# EAGLE board MicroMod-Ethernet-Function-Board-Panel-W5500 (EAGLE 9.6.2), part 1 of 3
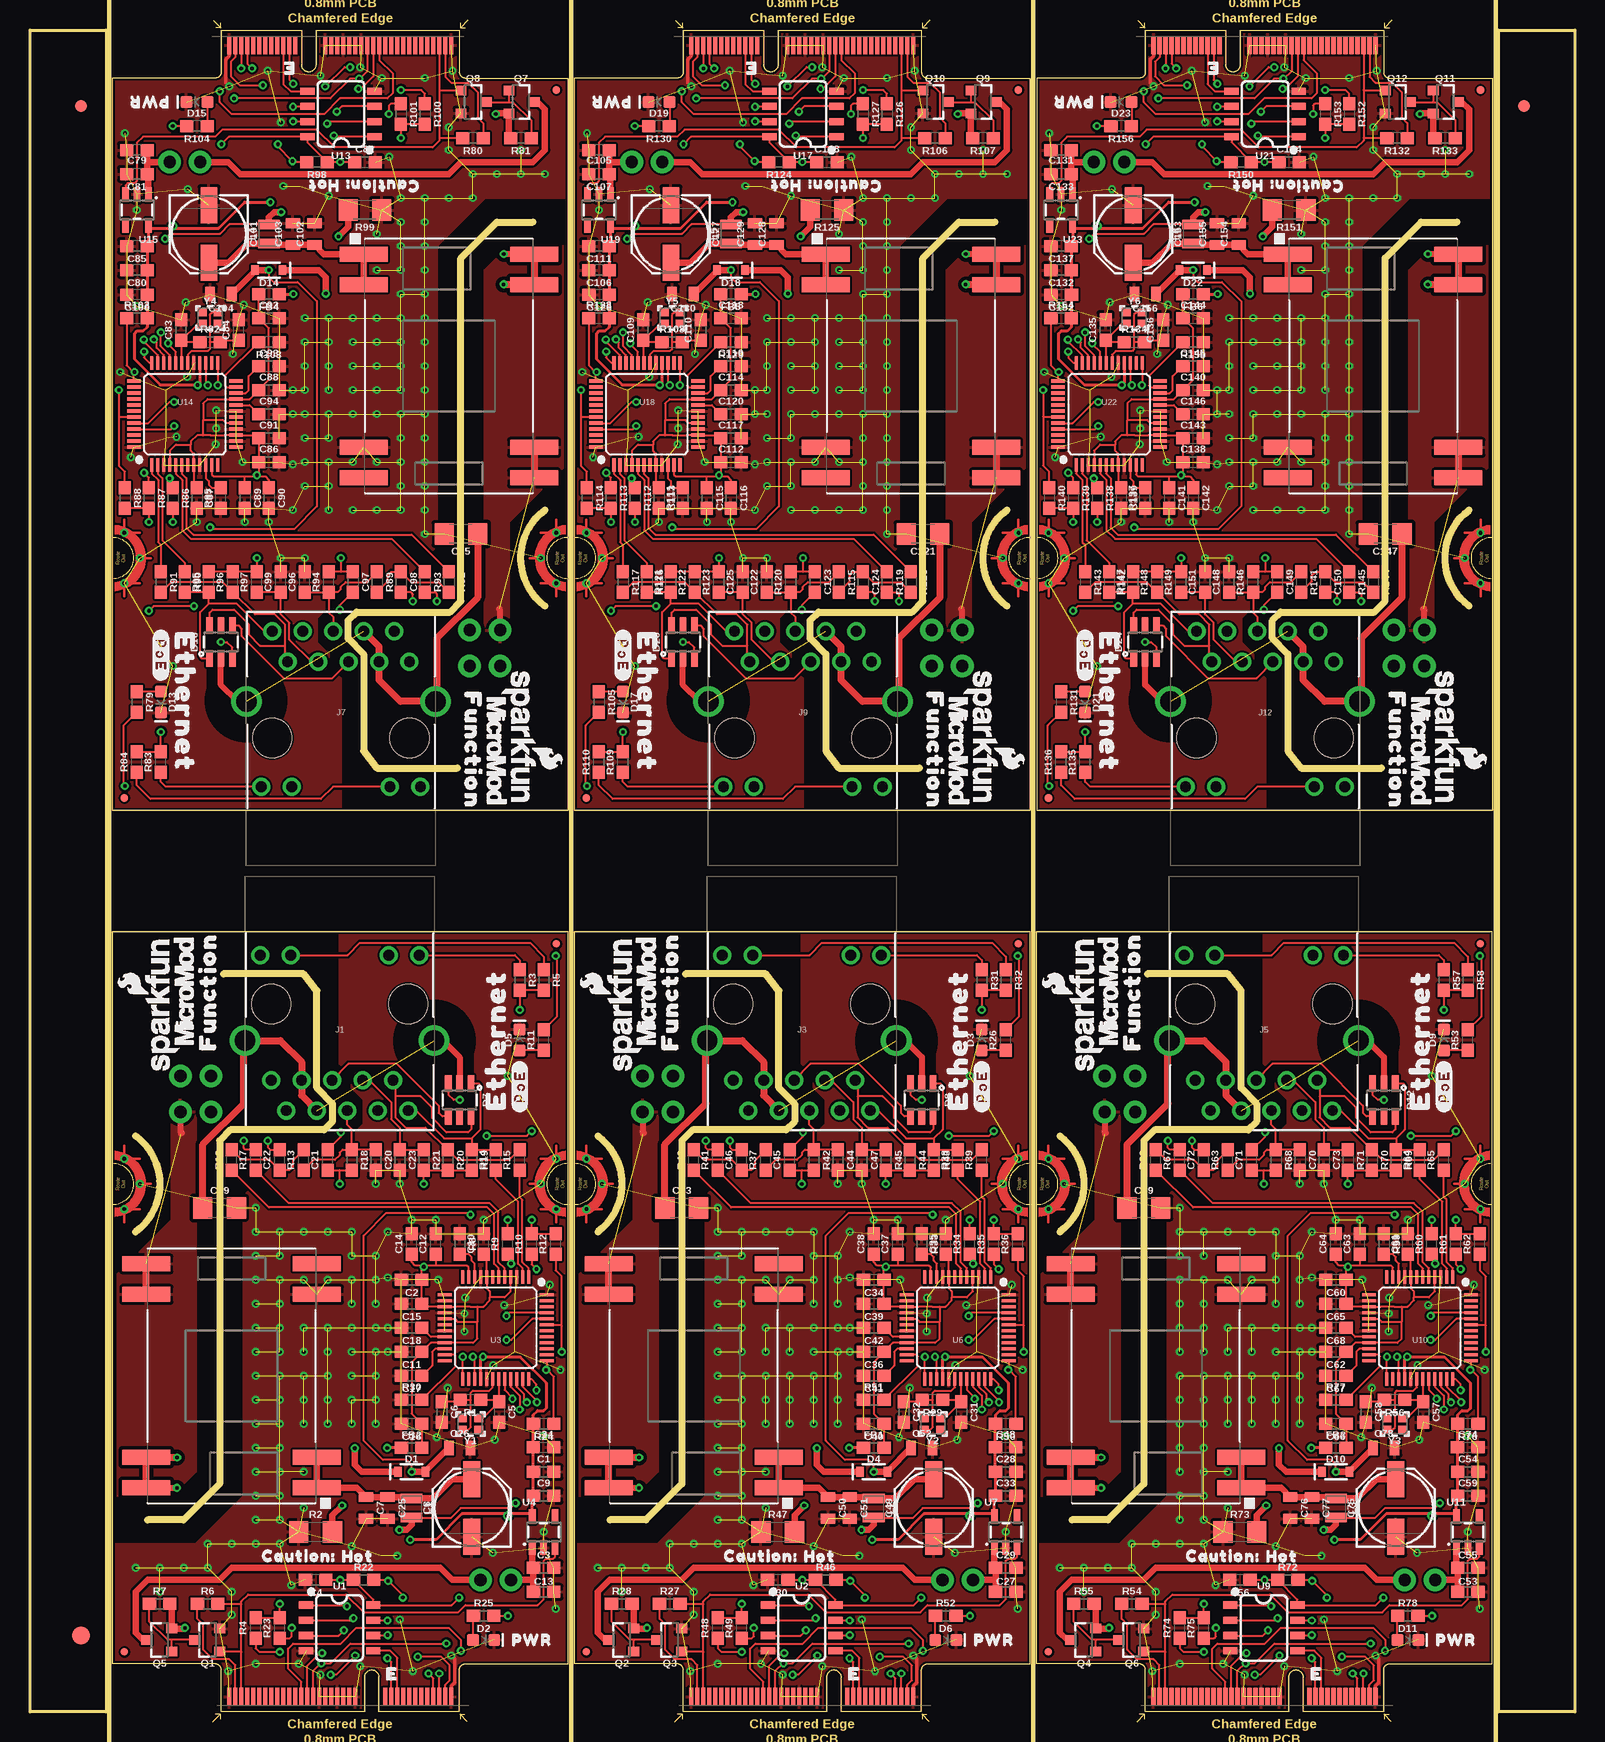
[diagram p0: board, top side]
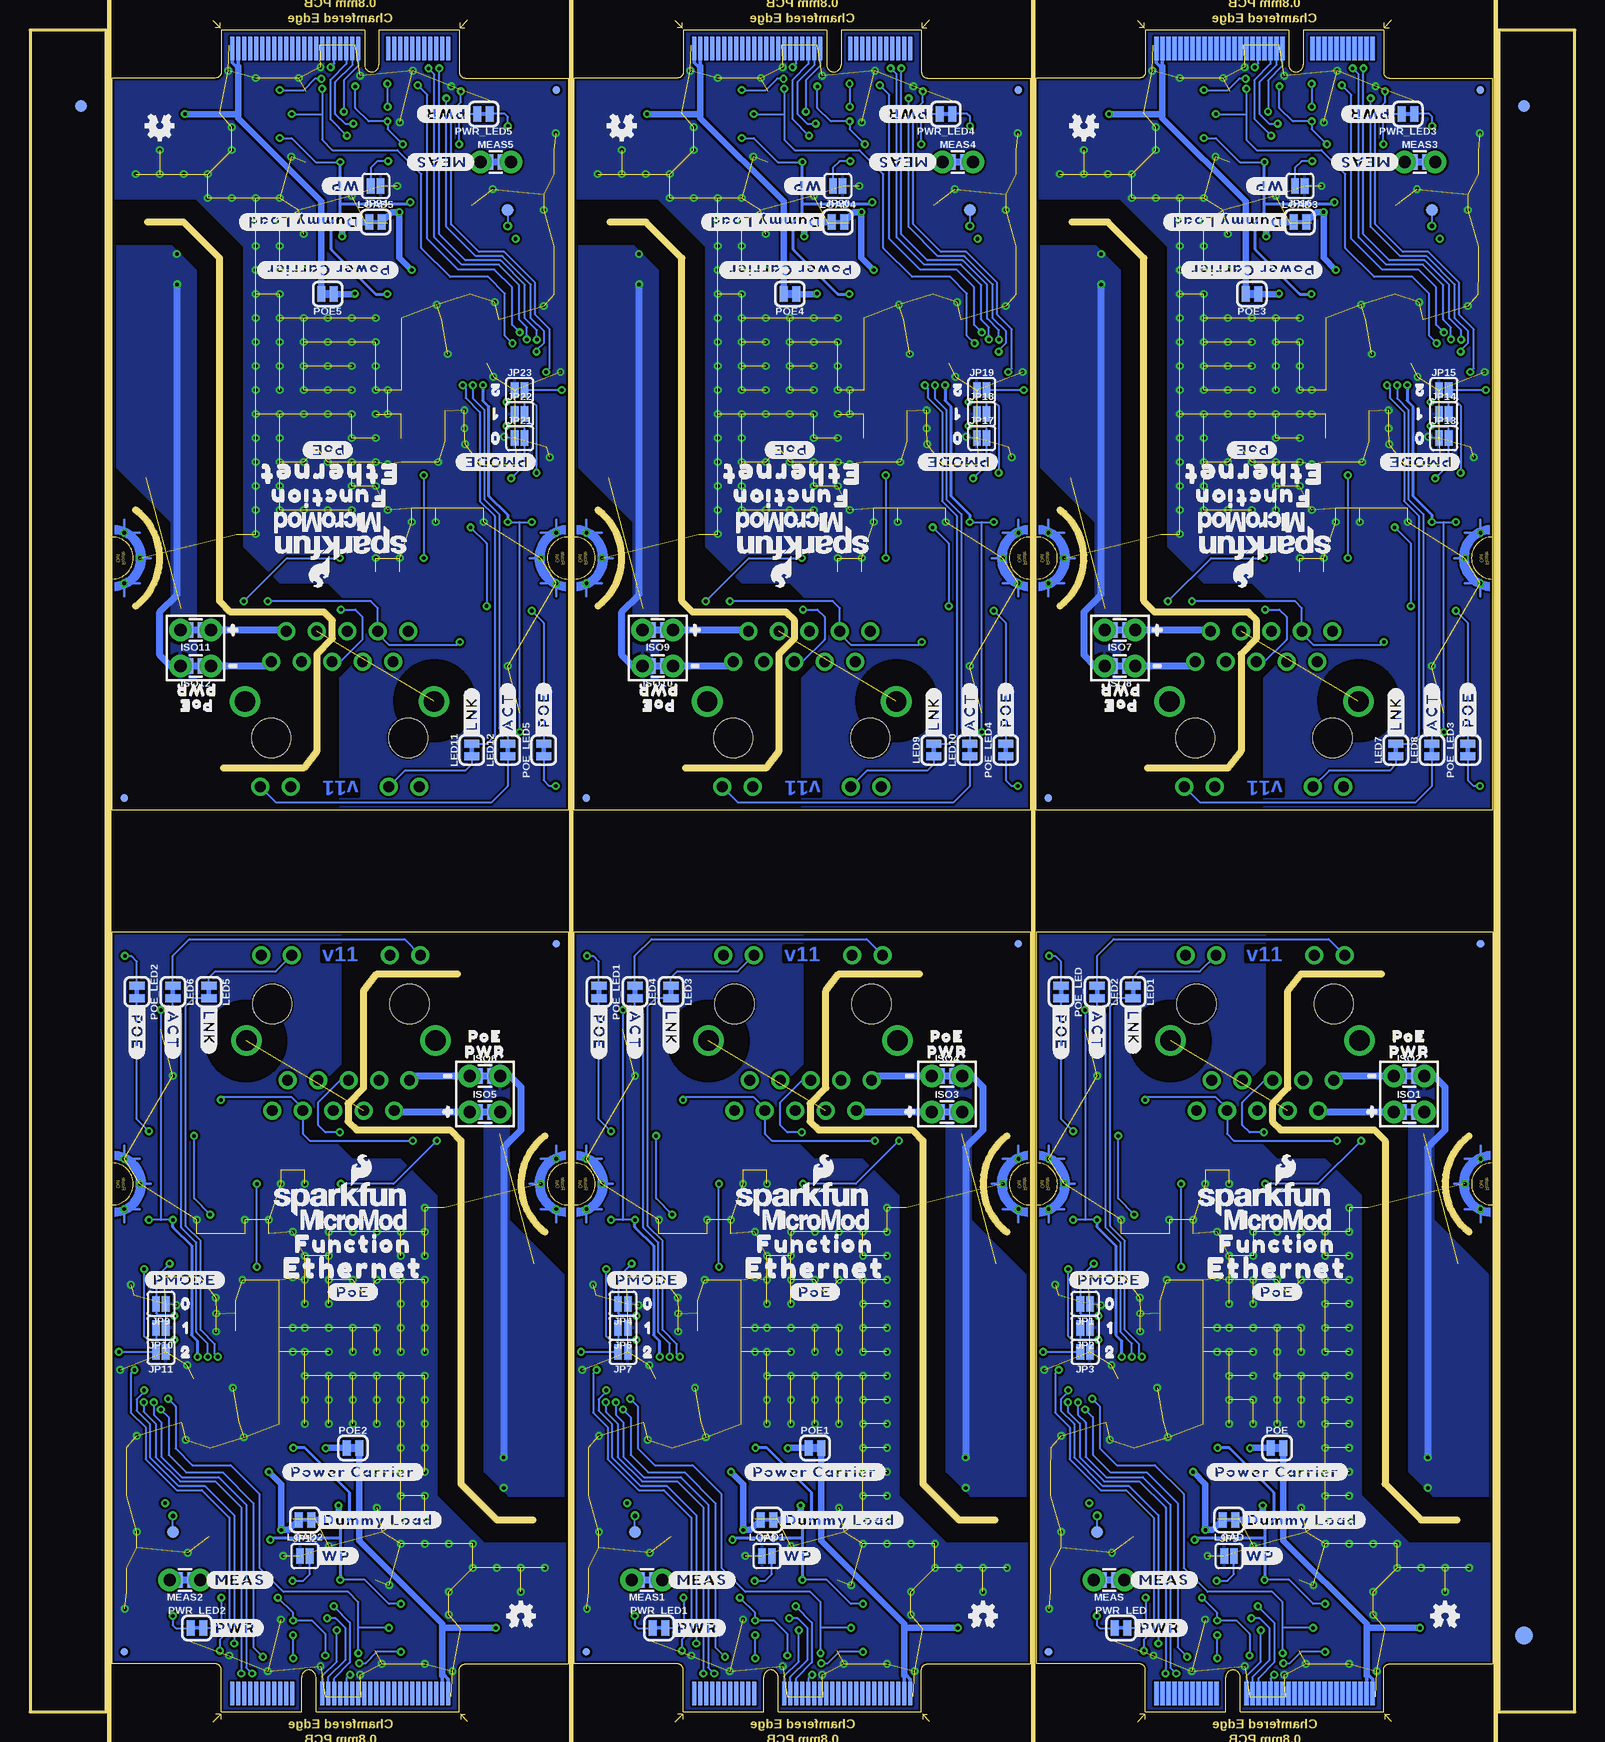
[diagram p1: board, bottom side, seen from below]

Size 128.73 x 140.16 mm. Coordinates in mm from the lower left corner, seen from the top.
Outline: 35.78,0 29.08,0 29.08,2.9 arc180 27.88,2.9 27.88,0 15.93,0 15.93,3.5 arc90 15.46,4 6.86,4 6.86,65 44.86,65 44.86,4 36.26,4 arc90 35.78,3.5 35.78,0
Outline: 74.29,0 67.59,0 67.59,2.9 arc180 66.39,2.9 66.39,0 54.44,0 54.44,3.5 arc90 53.97,4 45.37,4 45.37,65 83.37,65 83.37,4 74.77,4 arc90 74.29,3.5 74.29,0
Outline: 112.8,0 106.1,0 106.1,2.9 arc180 104.9,2.9 104.9,0 92.95,0 92.95,3.5 arc90 92.47,4 83.87,4 83.87,65 121.87,65 121.87,4 113.27,4 arc90 112.8,3.5 112.8,0
Outline: 15.93,140.16 22.63,140.16 22.63,137.26 arc180 23.84,137.26 23.84,140.16 35.78,140.16 35.78,136.66 arc90 36.26,136.16 44.86,136.16 44.86,75.16 6.86,75.16 6.86,136.16 15.46,136.16 arc90 15.93,136.66 15.93,140.16
Outline: 54.44,140.16 61.14,140.16 61.14,137.26 arc180 62.34,137.26 62.34,140.16 74.29,140.16 74.29,136.66 arc90 74.77,136.16 83.37,136.16 83.37,75.16 45.37,75.16 45.37,136.16 53.97,136.16 arc90 54.44,136.66 54.44,140.16
Outline: 92.95,140.16 99.65,140.16 99.65,137.26 arc180 100.85,137.26 100.85,140.16 112.8,140.16 112.8,136.66 arc90 113.28,136.16 121.88,136.16 121.88,75.16 83.88,75.16 83.88,136.16 92.48,136.16 arc90 92.95,136.66 92.95,140.16
Outline: 122.38,140.16 128.73,140.16 128.73,0 122.38,0 122.38,140.16
Outline: 0,140.16 6.35,140.16 6.35,0 0,0 0,140.16
Copper layers (1*16): Top 0.035mm / dielectric 1.5mm / Bottom 0.035mm
Design rules "MicroMod-Ethernet-Function-Board": minimum track width 7mil, minimum drill 12mil, track to track 7mil, track to pad 7mil, pad to pad 7mil, via to via 7mil, smd to smd 7mil, copper to edge 7mil, drill to drill 7mil, minimum pad ring 7mil, minimum via ring 7mil, stop-mask expansion 4mil, vias tented up to drill 25mil, thermal gap 10mil
Net classes: 0 default: width 0 mm, drill 0 mm
tRestrict: area 30.6,52.8 to 36.8,59; area 33.6,52.3 to 36.8,55.9; area 69.1,52.8 to 75.4,59; area 72.1,52.3 to 75.3,55.9; area 107.6,52.8 to 113.9,59; area 110.6,52.3 to 113.8,55.9; area 14.9,81.1 to 21.1,87.4; area 14.9,84.3 to 18.1,87.8; area 53.4,81.1 to 59.7,87.4; area 53.4,84.3 to 56.6,87.8; area 91.9,81.1 to 98.2,87.4; area 92,84.3 to 95.1,87.8
bRestrict: area 30.6,52.8 to 36.8,59; area 69.1,52.8 to 75.4,59; area 107.6,52.8 to 113.9,59; area 14.9,81.1 to 21.1,87.4; area 53.4,81.1 to 59.7,87.4; area 91.9,81.1 to 98.2,87.4
Milling: 76 lines

## Footprints (pad centres in the part's own frame; a part is rotated, then mirrored left to right if it is on the bottom)
0603 = smd 1.1 x 1: 1 -0.85,0; 2 0.85,0
0805 = smd 0.8 x 1.2: 1 -0.9,0; 2 0.9,0
PANASONIC_D = smd 3 x 1.4: + 2.4,0; - -2.4,0
1206 = smd 1.6 x 1.8: 1 -1.4,0; 2 1.4,0
SOD-323 = smd 0.63 x 0.83: A 1.15,0; C -1.15,0
LED-0603 = smd 1 x 1: A -0.877,0; C 0.877,0
SOT-23-6 = smd 0.55 x 1.35: 1 -0.95,-1.375; 2 0,-1.375; 3 0.95,-1.375; 4 0.95,1.375; 5 0,1.375; 6 -0.95,1.375
FIDUCIAL-1X2 = smd 1 x 1: 1 0,0
FIDUCIAL-1.5X3 = smd 1.5 x 1.5: 1 0,0
FIDUCIAL-MICRO = smd 0.635 x 0.635: 1 0,0
COMBO-JUMPER_2_NC_TRACE = smd 0.635 x 1.27: 1 -0.508,0; 2 0.508,0 | drill 1.016 pad 1.88: 3 -1.27,0; 4 1.27,0
MAGJACK-SYM_LED = drill 0.9 pad 1.5: 1 -5.715,8.89; 2 -4.445,6.35; 3 -3.175,8.89; 4 -1.905,6.35; 5 -0.635,8.89; 6 0.635,6.35; 7 1.905,8.89; 8 3.175,6.35; 9 4.445,8.89; 10 5.715,6.35; 11 -6.63,-4.06; 12 -4.09,-4.06; 13 4.09,-4.06; 14 6.63,-4.06 | drill 1.7 pad 2.4: S1 -7.875,3.05; S2 7.875,3.05 | hole 3.25: -5.715,0; 5.715,0
M.2-CARD-E-22_FUNCTION_STANDARD = smd 0.35 x 1.45: 1 9.25,1.275; 3 8.75,1.275; 5 8.25,1.275; 7 7.75,1.275; 9 7.25,1.275; 11 6.75,1.275; 13 6.25,1.275; 15 5.75,1.275; 17 5.25,1.275; 19 4.75,1.275; 21 4.25,1.275; 23 3.75,1.275; 33 1.25,1.275; 35 0.75,1.275; 37 0.25,1.275; 39 -0.25,1.275; 41 -0.75,1.275; 43 -1.25,1.275; 45 -1.75,1.275; 47 -2.25,1.275; 49 -2.75,1.275; 51 -3.25,1.275; 53 -3.75,1.275; 55 -4.25,1.275; 57 -4.75,1.275; 59 -5.25,1.275; 61 -5.75,1.275; 63 -6.25,1.275; 65 -6.75,1.275; 67 -7.25,1.275; 69 -7.75,1.275; 71 -8.25,1.275; 73 -8.75,1.275; 75 -9.25,1.275 | smd 0.35 x 1.95 bottom: 2 9,1.525; 4 8.5,1.525; 6 8,1.525; 8 7.5,1.525; 10 7,1.525; 12 6.5,1.525; 14 6,1.525; 16 5.5,1.525; 18 5,1.525; 20 4.5,1.525; 22 4,1.525; 32 1.5,1.525; 34 1,1.525; 36 0.5,1.525; 38 0,1.525; 40 -0.5,1.525; 42 -1,1.525; 44 -1.5,1.525; 46 -2,1.525; 48 -2.5,1.525; 50 -3,1.525; 52 -3.5,1.525; 54 -4,1.525; 56 -4.5,1.525; 58 -5,1.525; 60 -5.5,1.525; 62 -6,1.525; 64 -6.5,1.525; 66 -7,1.525; 68 -7.5,1.525; 70 -8,1.525; 72 -8.5,1.525; 74 -9,1.525 | drill 0.305 pad 0.61: GND1 -18,41.9; GND2 -16.7,44; GND3 -18,46.1; GND4 18,41.9; GND5 16.7,44; GND6 18,46.1
SMT-JUMPER_2_NO_SILK = smd 0.635 x 1.27: 1 -0.406,0; 2 0.406,0
0805-WIDE = smd 0.8 x 1.8: 1 -0.8,0; 2 0.8,0
SMT-JUMPER_2_NC_TRACE_SILK = smd 0.66 x 1.27: 1 -0.521,0; 2 0.521,0
SOT23-3 = smd 0.8 x 0.9: 1 -0.95,-1; 2 0.95,-1; 3 0,1.1
PAD.03X.04 = smd 1.016 x 1.016: 1 0,0
SO08 = smd 0.6 x 1.2: 1 -1.905,-2.8; 2 -0.635,-2.8; 3 0.635,-2.8; 4 1.905,-2.8; 5 1.905,2.8; 6 0.635,2.8; 7 -0.635,2.8; 8 -1.905,2.8
LQFP-48 = smd 0.254 x 1.143: 1 -2.75,-4.25; 2 -2.25,-4.25; 3 -1.75,-4.25; 4 -1.25,-4.25; 5 -0.75,-4.25; 6 -0.25,-4.25; 7 0.25,-4.25; 8 0.75,-4.25; 9 1.25,-4.25; 10 1.75,-4.25; 11 2.25,-4.25; 12 2.75,-4.25; 25 2.75,4.25; 26 2.25,4.25; 27 1.75,4.25; 28 1.25,4.25; 29 0.75,4.25; 30 0.25,4.25; 31 -0.25,4.25; 32 -0.75,4.25; 33 -1.25,4.25; 34 -1.75,4.25; 35 -2.25,4.25; 36 -2.75,4.25 | smd 1.143 x 0.254: 13 4.25,-2.75; 14 4.25,-2.25; 15 4.25,-1.75; 16 4.25,-1.25; 17 4.25,-0.75; 18 4.25,-0.25; 19 4.25,0.25; 20 4.25,0.75; 21 4.25,1.25; 22 4.25,1.75; 23 4.25,2.25; 24 4.25,2.75; 37 -4.25,2.75; 38 -4.25,2.25; 39 -4.25,1.75; 40 -4.25,1.25; 41 -4.25,0.75; 42 -4.25,0.25; 43 -4.25,-0.25; 44 -4.25,-0.75; 45 -4.25,-1.25; 46 -4.25,-1.75; 47 -4.25,-2.25; 48 -4.25,-2.75
SOT23-5 = smd 0.55 x 1.2: 1 -0.95,-1.3; 2 0,-1.3; 3 0.95,-1.3; 4 0.95,1.3; 5 -0.95,1.3
DP990X = smd 1.25 x 4: 1 -9.33,-7.1; 2 -6.79,-7.1; 3 6.79,-7.1; 4 9.33,-7.1; 5 9.33,7.1; 6 6.79,7.1; 7 -6.79,7.1; 8 -9.33,7.1
CRYSTAL-SMD-2.0X1.6MM = smd 0.75 x 0.7: 1 -0.675,-0.5; 2 0.675,-0.5; 3 0.675,0.5; 4 -0.675,0.5

## Placement (x,y rotation side)
C1  0.1uF  [0603]  42.81,20 0 top
C2  0.1uF  [0603]  31.81,36 180 top
C3  0.1uF  [0603]  42.81,12 0 top
C4  0.1uF  [0603]  23.81,11 180 top
C5  10pF  [0603]  39.11,25 270 top
C6  10pF  [0603]  34.31,25 270 top
C7  10uF  [0805]  28.01,17 270 top
C8  100uF  [PANASONIC_D]  36.81,17 90 top
C9  10uF  [0603]  42.81,18 0 top
C10  0.1uF  [0603]  37.81,39 90 top
C11  0.1uF  [0603]  31.81,30 180 top
C12  0.1uF  [0603]  33.81,39 90 top
C13  1.0uF  [0603]  42.81,10 0 top
C14  0.1uF  [0603]  31.81,39 90 top
C15  0.1uF  [0603]  31.81,34 180 top
C16  10uF  [0603]  31.81,24 180 top
C17  10nF  [0603]  31.81,28 180 top
C18  4.7uF  [0603]  31.81,32 180 top
C19  1nF  [1206]  15.81,42 0 top
C20  10nF  [0603]  28.81,46 270 top
C21  6.8nF  [0603]  24.81,46 90 top
C22  6.8nF  [0603]  20.81,46 90 top
C23  22nF  [0603]  30.81,46 270 top
C24  1.0uF  [0603]  42.8,22.05 0 top
C25  10uF  [0805]  29.81,17 270 top
C26  10uF  [0805]  35.81,22 0 top
C27  1.0uF  [0603]  81.32,10 0 top
C28  0.1uF  [0603]  81.32,20 0 top
C29  0.1uF  [0603]  81.32,12 0 top
C30  0.1uF  [0603]  62.32,11 180 top
C31  10pF  [0603]  77.62,25 270 top
C32  10pF  [0603]  72.82,25 270 top
C33  10uF  [0603]  81.32,18 0 top
C34  0.1uF  [0603]  70.32,36 180 top
C35  0.1uF  [0603]  76.32,39 90 top
C36  0.1uF  [0603]  70.32,30 180 top
C37  0.1uF  [0603]  72.32,39 90 top
C38  0.1uF  [0603]  70.32,39 90 top
C39  0.1uF  [0603]  70.32,34 180 top
C40  10uF  [0603]  70.32,24 180 top
C41  10nF  [0603]  70.32,28 180 top
C42  4.7uF  [0603]  70.32,32 180 top
C43  1nF  [1206]  54.32,42 0 top
C44  10nF  [0603]  67.32,46 270 top
C45  6.8nF  [0603]  63.32,46 90 top
C46  6.8nF  [0603]  59.32,46 90 top
C47  22nF  [0603]  69.32,46 270 top
C48  1.0uF  [0603]  81.31,22.05 0 top
C49  100uF  [PANASONIC_D]  75.32,17 90 top
C50  10uF  [0805]  66.52,17 270 top
C51  10uF  [0805]  68.32,17 270 top
C52  10uF  [0805]  74.32,22 0 top
C53  1.0uF  [0603]  119.82,10 0 top
C54  0.1uF  [0603]  119.82,20 0 top
C55  0.1uF  [0603]  119.82,12 0 top
C56  0.1uF  [0603]  100.82,11 180 top
C57  10pF  [0603]  116.12,25 270 top
C58  10pF  [0603]  111.32,25 270 top
C59  10uF  [0603]  119.82,18 0 top
C60  0.1uF  [0603]  108.82,36 180 top
C61  0.1uF  [0603]  114.82,39 90 top
C62  0.1uF  [0603]  108.82,30 180 top
C63  0.1uF  [0603]  110.82,39 90 top
C64  0.1uF  [0603]  108.82,39 90 top
C65  0.1uF  [0603]  108.82,34 180 top
C66  10uF  [0603]  108.82,24 180 top
C67  10nF  [0603]  108.82,28 180 top
C68  4.7uF  [0603]  108.82,32 180 top
C69  1nF  [1206]  92.82,42 0 top
C70  10nF  [0603]  105.82,46 270 top
C71  6.8nF  [0603]  101.82,46 90 top
C72  6.8nF  [0603]  97.82,46 90 top
C73  22nF  [0603]  107.82,46 270 top
C74  1.0uF  [0603]  119.81,22.05 0 top
C75  100uF  [PANASONIC_D]  113.82,17 90 top
C76  10uF  [0805]  105.02,17 270 top
C77  10uF  [0805]  106.82,17 270 top
C78  10uF  [0805]  112.82,22 0 top
C79  1.0uF  [0603]  8.91,130.16 180 top
C80  0.1uF  [0603]  8.91,120.16 180 top
C81  0.1uF  [0603]  8.91,128.16 180 top
C82  0.1uF  [0603]  27.91,129.16 0 top
C83  10pF  [0603]  12.61,115.16 90 top
C84  10pF  [0603]  17.41,115.16 90 top
C85  10uF  [0603]  8.91,122.16 180 top
C86  0.1uF  [0603]  19.91,104.16 0 top
C87  0.1uF  [0603]  13.91,101.16 270 top
C88  0.1uF  [0603]  19.91,110.16 0 top
C89  0.1uF  [0603]  17.91,101.16 270 top
C90  0.1uF  [0603]  19.91,101.16 270 top
C91  0.1uF  [0603]  19.91,106.16 0 top
C92  10uF  [0603]  19.91,116.16 0 top
C93  10nF  [0603]  19.91,112.16 0 top
C94  4.7uF  [0603]  19.91,108.16 0 top
C95  1nF  [1206]  35.91,98.16 180 top
C96  10nF  [0603]  22.91,94.16 90 top
C97  6.8nF  [0603]  26.91,94.16 270 top
C98  6.8nF  [0603]  30.91,94.16 270 top
C99  22nF  [0603]  20.91,94.16 90 top
C100  1.0uF  [0603]  8.92,118.11 180 top
C101  100uF  [PANASONIC_D]  14.91,123.16 270 top
C102  10uF  [0805]  23.71,123.16 90 top
C103  10uF  [0805]  21.91,123.16 90 top
C104  10uF  [0805]  15.91,118.16 180 top
C105  1.0uF  [0603]  47.42,130.16 180 top
C106  0.1uF  [0603]  47.42,120.16 180 top
C107  0.1uF  [0603]  47.42,128.16 180 top
C108  0.1uF  [0603]  66.42,129.16 0 top
C109  10pF  [0603]  51.12,115.16 90 top
C110  10pF  [0603]  55.92,115.16 90 top
C111  10uF  [0603]  47.42,122.16 180 top
C112  0.1uF  [0603]  58.42,104.16 0 top
C113  0.1uF  [0603]  52.42,101.16 270 top
C114  0.1uF  [0603]  58.42,110.16 0 top
C115  0.1uF  [0603]  56.42,101.16 270 top
C116  0.1uF  [0603]  58.42,101.16 270 top
C117  0.1uF  [0603]  58.42,106.16 0 top
C118  10uF  [0603]  58.42,116.16 0 top
C119  10nF  [0603]  58.42,112.16 0 top
C120  4.7uF  [0603]  58.42,108.16 0 top
C121  1nF  [1206]  74.42,98.16 180 top
C122  10nF  [0603]  61.42,94.16 90 top
C123  6.8nF  [0603]  65.42,94.16 270 top
C124  6.8nF  [0603]  69.42,94.16 270 top
C125  22nF  [0603]  59.42,94.16 90 top
C126  1.0uF  [0603]  47.43,118.11 180 top
C127  100uF  [PANASONIC_D]  53.42,123.16 270 top
C128  10uF  [0805]  62.22,123.16 90 top
C129  10uF  [0805]  60.42,123.16 90 top
C130  10uF  [0805]  54.42,118.16 180 top
C131  1.0uF  [0603]  85.93,130.16 180 top
C132  0.1uF  [0603]  85.93,120.16 180 top
C133  0.1uF  [0603]  85.93,128.16 180 top
C134  0.1uF  [0603]  104.93,129.16 0 top
C135  10pF  [0603]  89.63,115.16 90 top
C136  10pF  [0603]  94.43,115.16 90 top
C137  10uF  [0603]  85.93,122.16 180 top
C138  0.1uF  [0603]  96.93,104.16 0 top
C139  0.1uF  [0603]  90.93,101.16 270 top
C140  0.1uF  [0603]  96.93,110.16 0 top
C141  0.1uF  [0603]  94.93,101.16 270 top
C142  0.1uF  [0603]  96.93,101.16 270 top
C143  0.1uF  [0603]  96.93,106.16 0 top
C144  10uF  [0603]  96.93,116.16 0 top
C145  10nF  [0603]  96.93,112.16 0 top
C146  4.7uF  [0603]  96.93,108.16 0 top
C147  1nF  [1206]  112.93,98.16 180 top
C148  10nF  [0603]  99.93,94.16 90 top
C149  6.8nF  [0603]  103.93,94.16 270 top
C150  6.8nF  [0603]  107.93,94.16 270 top
C151  22nF  [0603]  97.93,94.16 90 top
C152  1.0uF  [0603]  85.94,118.11 180 top
C153  100uF  [PANASONIC_D]  91.93,123.16 270 top
C154  10uF  [0805]  100.73,123.16 90 top
C155  10uF  [0805]  98.93,123.16 90 top
C156  10uF  [0805]  92.93,118.16 180 top
D1  3A/10V/280mV  [SOD-323]  31.81,20 0 top
D2  RED  [LED-0603]  37.81,6 0 top
D3  Yellow  [LED-0603]  79.32,56 90 top
D4  3A/10V/280mV  [SOD-323]  70.32,20 0 top
D5  Yellow  [LED-0603]  40.81,56 90 top
D6  RED  [LED-0603]  76.32,6 0 top
D7  DT1042-04SO  [SOT-23-6]  35.81,51 180 top
D8  DT1042-04SO  [SOT-23-6]  74.32,51 180 top
D9  Yellow  [LED-0603]  117.82,56 90 top
D10  3A/10V/280mV  [SOD-323]  108.82,20 0 top
D11  RED  [LED-0603]  114.82,6 0 top
D12  DT1042-04SO  [SOT-23-6]  112.82,51 180 top
D13  Yellow  [LED-0603]  10.91,84.16 270 top
D14  3A/10V/280mV  [SOD-323]  19.91,120.16 180 top
D15  RED  [LED-0603]  13.91,134.16 180 top
D16  DT1042-04SO  [SOT-23-6]  15.91,89.16 0 top
D17  Yellow  [LED-0603]  49.42,84.16 270 top
D18  3A/10V/280mV  [SOD-323]  58.42,120.16 180 top
D19  RED  [LED-0603]  52.42,134.16 180 top
D20  DT1042-04SO  [SOT-23-6]  54.42,89.16 0 top
D21  Yellow  [LED-0603]  87.93,84.16 270 top
D22  3A/10V/280mV  [SOD-323]  96.93,120.16 180 top
D23  RED  [LED-0603]  90.93,134.16 180 top
D24  DT1042-04SO  [SOT-23-6]  92.93,89.16 0 top
E$1  [FIDUCIAL-1X2]  4.23,133.81 0 top
E$2  [FIDUCIAL-1X2]  4.23,133.81 0 bottom
E$3  [FIDUCIAL-1X2]  124.5,133.81 0 top
E$4  [FIDUCIAL-1X2]  124.5,133.81 0 bottom
E$5  [FIDUCIAL-1.5X3]  4.23,6.35 0 top
E$6  [FIDUCIAL-1.5X3]  4.23,6.35 0 bottom
FB1  470Ω  [0603]  70.32,22 0 top
FB2  470Ω  [0603]  31.81,22 0 top
FB3  470Ω  [0603]  108.82,22 0 top
FB4  470Ω  [0603]  19.91,118.16 180 top
FB5  470Ω  [0603]  58.42,118.16 180 top
FB6  470Ω  [0603]  96.93,118.16 180 top
FD1  FIDUCIALUFIDUCIAL  [FIDUCIAL-MICRO]  7.86,5 90 top
FD2  FIDUCIALUFIDUCIAL  [FIDUCIAL-MICRO]  43.86,64 90 top
FD3  FIDUCIALUFIDUCIAL  [FIDUCIAL-MICRO]  43.86,5 270 bottom
FD4  FIDUCIALUFIDUCIAL  [FIDUCIAL-MICRO]  7.86,64 270 bottom
FD5  FIDUCIALUFIDUCIAL  [FIDUCIAL-MICRO]  46.37,5 90 top
FD6  FIDUCIALUFIDUCIAL  [FIDUCIAL-MICRO]  82.37,64 90 top
FD7  FIDUCIALUFIDUCIAL  [FIDUCIAL-MICRO]  82.37,5 270 bottom
FD8  FIDUCIALUFIDUCIAL  [FIDUCIAL-MICRO]  46.37,64 270 bottom
FD9  FIDUCIALUFIDUCIAL  [FIDUCIAL-MICRO]  84.87,5 90 top
FD10  FIDUCIALUFIDUCIAL  [FIDUCIAL-MICRO]  120.87,64 90 top
FD11  FIDUCIALUFIDUCIAL  [FIDUCIAL-MICRO]  120.87,5 270 bottom
FD12  FIDUCIALUFIDUCIAL  [FIDUCIAL-MICRO]  84.87,64 270 bottom
FD13  FIDUCIALUFIDUCIAL  [FIDUCIAL-MICRO]  43.86,135.16 270 top
FD14  FIDUCIALUFIDUCIAL  [FIDUCIAL-MICRO]  7.86,76.16 270 top
FD15  FIDUCIALUFIDUCIAL  [FIDUCIAL-MICRO]  7.86,135.16 90 bottom
FD16  FIDUCIALUFIDUCIAL  [FIDUCIAL-MICRO]  43.86,76.16 90 bottom
FD17  FIDUCIALUFIDUCIAL  [FIDUCIAL-MICRO]  82.37,135.16 270 top
FD18  FIDUCIALUFIDUCIAL  [FIDUCIAL-MICRO]  46.37,76.16 270 top
FD19  FIDUCIALUFIDUCIAL  [FIDUCIAL-MICRO]  46.37,135.16 90 bottom
FD20  FIDUCIALUFIDUCIAL  [FIDUCIAL-MICRO]  82.37,76.16 90 bottom
FD21  FIDUCIALUFIDUCIAL  [FIDUCIAL-MICRO]  120.88,135.16 270 top
FD22  FIDUCIALUFIDUCIAL  [FIDUCIAL-MICRO]  84.88,76.16 270 top
FD23  FIDUCIALUFIDUCIAL  [FIDUCIAL-MICRO]  84.88,135.16 90 bottom
FD24  FIDUCIALUFIDUCIAL  [FIDUCIAL-MICRO]  120.88,76.16 90 bottom
ISO1  JUMPER-COMBO_2_NC_TRACE  [COMBO-JUMPER_2_NC_TRACE]  13.81,50 0 bottom
ISO2  JUMPER-COMBO_2_NC_TRACE  [COMBO-JUMPER_2_NC_TRACE]  13.81,53 0 bottom
ISO3  JUMPER-COMBO_2_NC_TRACE  [COMBO-JUMPER_2_NC_TRACE]  52.32,50 0 bottom
ISO4  JUMPER-COMBO_2_NC_TRACE  [COMBO-JUMPER_2_NC_TRACE]  52.32,53 0 bottom
ISO5  JUMPER-COMBO_2_NC_TRACE  [COMBO-JUMPER_2_NC_TRACE]  90.82,50 0 bottom
ISO6  JUMPER-COMBO_2_NC_TRACE  [COMBO-JUMPER_2_NC_TRACE]  90.82,53 0 bottom
ISO7  JUMPER-COMBO_2_NC_TRACE  [COMBO-JUMPER_2_NC_TRACE]  37.91,90.16 180 bottom
ISO8  JUMPER-COMBO_2_NC_TRACE  [COMBO-JUMPER_2_NC_TRACE]  37.91,87.16 180 bottom
ISO9  JUMPER-COMBO_2_NC_TRACE  [COMBO-JUMPER_2_NC_TRACE]  76.42,90.16 180 bottom
ISO10  JUMPER-COMBO_2_NC_TRACE  [COMBO-JUMPER_2_NC_TRACE]  76.42,87.16 180 bottom
ISO11  JUMPER-COMBO_2_NC_TRACE  [COMBO-JUMPER_2_NC_TRACE]  114.93,90.16 180 bottom
ISO12  JUMPER-COMBO_2_NC_TRACE  [COMBO-JUMPER_2_NC_TRACE]  114.93,87.16 180 bottom
J1  MAGJACK-POE  [MAGJACK-SYM_LED]  25.81,59 180 top
J2  MICROMOD_STANDARD  [M.2-CARD-E-22_FUNCTION_STANDARD]  64.37,0 0 top
J3  MAGJACK-POE  [MAGJACK-SYM_LED]  64.32,59 180 top
J4  MICROMOD_STANDARD  [M.2-CARD-E-22_FUNCTION_STANDARD]  102.87,0 0 top
J5  MAGJACK-POE  [MAGJACK-SYM_LED]  102.82,59 180 top
J6  MICROMOD_STANDARD  [M.2-CARD-E-22_FUNCTION_STANDARD]  25.86,140.16 180 top
J7  MAGJACK-POE  [MAGJACK-SYM_LED]  25.91,81.16 0 top
J8  MICROMOD_STANDARD  [M.2-CARD-E-22_FUNCTION_STANDARD]  64.37,140.16 180 top
J9  MAGJACK-POE  [MAGJACK-SYM_LED]  64.42,81.16 0 top
J10  MICROMOD_STANDARD  [M.2-CARD-E-22_FUNCTION_STANDARD]  102.88,140.16 180 top
J11  MICROMOD_STANDARD  [M.2-CARD-E-22_FUNCTION_STANDARD]  25.86,0 0 top
J12  MAGJACK-POE  [MAGJACK-SYM_LED]  102.93,81.16 0 top
JP1  JUMPER-SMT_2_NO_SILK  [SMT-JUMPER_2_NO_SILK]  40.81,34 180 bottom
JP2  JUMPER-SMT_2_NO_SILK  [SMT-JUMPER_2_NO_SILK]  40.81,32 180 bottom
JP3  JUMPER-SMT_2_NO_SILK  [SMT-JUMPER_2_NO_SILK]  40.81,30 180 bottom
JP4  JUMPER-SMT_2_NO_SILK  [SMT-JUMPER_2_NO_SILK]  79.32,34 180 bottom
JP5  JUMPER-SMT_2_NO_SILK  [SMT-JUMPER_2_NO_SILK]  28.81,13 0 bottom
JP6  JUMPER-SMT_2_NO_SILK  [SMT-JUMPER_2_NO_SILK]  79.32,32 180 bottom
JP7  JUMPER-SMT_2_NO_SILK  [SMT-JUMPER_2_NO_SILK]  79.32,30 180 bottom
JP8  JUMPER-SMT_2_NO_SILK  [SMT-JUMPER_2_NO_SILK]  67.32,13 0 bottom
JP9  JUMPER-SMT_2_NO_SILK  [SMT-JUMPER_2_NO_SILK]  117.82,34 180 bottom
JP10  JUMPER-SMT_2_NO_SILK  [SMT-JUMPER_2_NO_SILK]  117.82,32 180 bottom
JP11  JUMPER-SMT_2_NO_SILK  [SMT-JUMPER_2_NO_SILK]  117.82,30 180 bottom
JP12  JUMPER-SMT_2_NO_SILK  [SMT-JUMPER_2_NO_SILK]  105.82,13 0 bottom
JP13  JUMPER-SMT_2_NO_SILK  [SMT-JUMPER_2_NO_SILK]  10.91,106.16 0 bottom
JP14  JUMPER-SMT_2_NO_SILK  [SMT-JUMPER_2_NO_SILK]  10.91,108.16 0 bottom
JP15  JUMPER-SMT_2_NO_SILK  [SMT-JUMPER_2_NO_SILK]  10.91,110.16 0 bottom
JP16  JUMPER-SMT_2_NO_SILK  [SMT-JUMPER_2_NO_SILK]  22.91,127.16 180 bottom
JP17  JUMPER-SMT_2_NO_SILK  [SMT-JUMPER_2_NO_SILK]  49.42,106.16 0 bottom
JP18  JUMPER-SMT_2_NO_SILK  [SMT-JUMPER_2_NO_SILK]  49.42,108.16 0 bottom
JP19  JUMPER-SMT_2_NO_SILK  [SMT-JUMPER_2_NO_SILK]  49.42,110.16 0 bottom
JP20  JUMPER-SMT_2_NO_SILK  [SMT-JUMPER_2_NO_SILK]  61.42,127.16 180 bottom
JP21  JUMPER-SMT_2_NO_SILK  [SMT-JUMPER_2_NO_SILK]  87.93,106.16 0 bottom
JP22  JUMPER-SMT_2_NO_SILK  [SMT-JUMPER_2_NO_SILK]  87.93,108.16 0 bottom
JP23  JUMPER-SMT_2_NO_SILK  [SMT-JUMPER_2_NO_SILK]  87.93,110.16 0 bottom
JP24  JUMPER-SMT_2_NO_SILK  [SMT-JUMPER_2_NO_SILK]  99.93,127.16 180 bottom
L1  2.2uH  [0805-WIDE]  31.81,17 270 top
L2  2.2uH  [0805-WIDE]  70.32,17 270 top
L3  2.2uH  [0805-WIDE]  108.82,17 270 top
L4  2.2uH  [0805-WIDE]  19.91,123.16 90 top
L5  2.2uH  [0805-WIDE]  58.42,123.16 90 top
L6  2.2uH  [0805-WIDE]  96.93,123.16 90 top
LED1  JUMPER-SMT_2_NC_TRACE_SILK  [SMT-JUMPER_2_NC_TRACE_SILK]  36.81,60 270 bottom
LED2  JUMPER-SMT_2_NC_TRACE_SILK  [SMT-JUMPER_2_NC_TRACE_SILK]  39.81,60 270 bottom
LED3  JUMPER-SMT_2_NC_TRACE_SILK  [SMT-JUMPER_2_NC_TRACE_SILK]  75.32,60 270 bottom
LED4  JUMPER-SMT_2_NC_TRACE_SILK  [SMT-JUMPER_2_NC_TRACE_SILK]  78.32,60 270 bottom
LED5  JUMPER-SMT_2_NC_TRACE_SILK  [SMT-JUMPER_2_NC_TRACE_SILK]  113.82,60 270 bottom
LED6  JUMPER-SMT_2_NC_TRACE_SILK  [SMT-JUMPER_2_NC_TRACE_SILK]  116.82,60 270 bottom
LED7  JUMPER-SMT_2_NC_TRACE_SILK  [SMT-JUMPER_2_NC_TRACE_SILK]  14.91,80.16 90 bottom
LED8  JUMPER-SMT_2_NC_TRACE_SILK  [SMT-JUMPER_2_NC_TRACE_SILK]  11.91,80.16 90 bottom
LED9  JUMPER-SMT_2_NC_TRACE_SILK  [SMT-JUMPER_2_NC_TRACE_SILK]  53.42,80.16 90 bottom
LED10  JUMPER-SMT_2_NC_TRACE_SILK  [SMT-JUMPER_2_NC_TRACE_SILK]  50.42,80.16 90 bottom
LED11  JUMPER-SMT_2_NC_TRACE_SILK  [SMT-JUMPER_2_NC_TRACE_SILK]  91.93,80.16 90 bottom
LED12  JUMPER-SMT_2_NC_TRACE_SILK  [SMT-JUMPER_2_NC_TRACE_SILK]  88.93,80.16 90 bottom
LOAD  JUMPER-SMT_2_NC_TRACE_SILK  [SMT-JUMPER_2_NC_TRACE_SILK]  28.81,16 180 bottom
LOAD1  JUMPER-SMT_2_NC_TRACE_SILK  [SMT-JUMPER_2_NC_TRACE_SILK]  67.32,16 180 bottom
LOAD2  JUMPER-SMT_2_NC_TRACE_SILK  [SMT-JUMPER_2_NC_TRACE_SILK]  105.82,16 180 bottom
LOAD3  JUMPER-SMT_2_NC_TRACE_SILK  [SMT-JUMPER_2_NC_TRACE_SILK]  22.91,124.16 0 bottom
LOAD4  JUMPER-SMT_2_NC_TRACE_SILK  [SMT-JUMPER_2_NC_TRACE_SILK]  61.42,124.16 0 bottom
LOAD5  JUMPER-SMT_2_NC_TRACE_SILK  [SMT-JUMPER_2_NC_TRACE_SILK]  99.93,124.16 0 bottom
LOGO1  SFE_LOGO_NAME_FLAME.1_INCH  [SFE_LOGO_NAME_FLAME_.1]  11,58.97 90 top
LOGO2  SFE_LOGO_NAME_FLAME.1_INCH  [SFE_LOGO_NAME_FLAME_.1]  49.51,58.97 90 top
LOGO3  OSHW-LOGOMINI  [OSHW-LOGO-MINI]  10.81,8 0 bottom
LOGO4  SFE_LOGO_NAME_FLAME.1_INCH  [SFE_LOGO_NAME_FLAME_.1]  25.83,42.76 0 bottom
LOGO5  OSHW-LOGOMINI  [OSHW-LOGO-MINI]  49.32,8 0 bottom
LOGO6  SFE_LOGO_NAME_FLAME.1_INCH  [SFE_LOGO_NAME_FLAME_.1]  64.34,42.76 0 bottom
LOGO7  SFE_LOGO_NAME_FLAME.1_INCH  [SFE_LOGO_NAME_FLAME_.1]  88.01,58.97 90 top
LOGO8  OSHW-LOGOMINI  [OSHW-LOGO-MINI]  87.82,8 0 bottom
LOGO9  SFE_LOGO_NAME_FLAME.1_INCH  [SFE_LOGO_NAME_FLAME_.1]  102.84,42.76 0 bottom
LOGO10  SFE_LOGO_NAME_FLAME.1_INCH  [SFE_LOGO_NAME_FLAME_.1]  40.72,81.19 270 top
LOGO11  OSHW-LOGOMINI  [OSHW-LOGO-MINI]  40.91,132.16 180 bottom
LOGO12  SFE_LOGO_NAME_FLAME.1_INCH  [SFE_LOGO_NAME_FLAME_.1]  25.89,97.4 180 bottom
LOGO13  SFE_LOGO_NAME_FLAME.1_INCH  [SFE_LOGO_NAME_FLAME_.1]  79.23,81.19 270 top
LOGO14  OSHW-LOGOMINI  [OSHW-LOGO-MINI]  79.42,132.16 180 bottom
LOGO15  SFE_LOGO_NAME_FLAME.1_INCH  [SFE_LOGO_NAME_FLAME_.1]  64.4,97.4 180 bottom
LOGO16  SFE_LOGO_NAME_FLAME.1_INCH  [SFE_LOGO_NAME_FLAME_.1]  117.73,81.19 270 top
LOGO17  OSHW-LOGOMINI  [OSHW-LOGO-MINI]  117.93,132.16 180 bottom
LOGO18  SFE_LOGO_NAME_FLAME.1_INCH  [SFE_LOGO_NAME_FLAME_.1]  102.91,97.4 180 bottom
MEAS  JUMPER-COMBO_2_NC_TRACE  [COMBO-JUMPER_2_NC_TRACE]  38.81,11 180 bottom
MEAS1  JUMPER-COMBO_2_NC_TRACE  [COMBO-JUMPER_2_NC_TRACE]  77.32,11 180 bottom
MEAS2  JUMPER-COMBO_2_NC_TRACE  [COMBO-JUMPER_2_NC_TRACE]  115.82,11 180 bottom
MEAS3  JUMPER-COMBO_2_NC_TRACE  [COMBO-JUMPER_2_NC_TRACE]  12.91,129.16 0 bottom
MEAS4  JUMPER-COMBO_2_NC_TRACE  [COMBO-JUMPER_2_NC_TRACE]  51.42,129.16 0 bottom
MEAS5  JUMPER-COMBO_2_NC_TRACE  [COMBO-JUMPER_2_NC_TRACE]  89.93,129.16 0 bottom
POE  [SMT-JUMPER_2_NC_TRACE_SILK]  24.81,22 0 bottom
POE1  [SMT-JUMPER_2_NC_TRACE_SILK]  63.32,22 0 bottom
POE2  [SMT-JUMPER_2_NC_TRACE_SILK]  101.82,22 0 bottom
POE3  [SMT-JUMPER_2_NC_TRACE_SILK]  26.91,118.16 180 bottom
POE4  [SMT-JUMPER_2_NC_TRACE_SILK]  65.42,118.16 180 bottom
POE5  [SMT-JUMPER_2_NC_TRACE_SILK]  103.93,118.16 180 bottom
POE_LED  JUMPER-SMT_2_NC_TRACE_SILK  [SMT-JUMPER_2_NC_TRACE_SILK]  42.81,60 270 bottom
POE_LED1  JUMPER-SMT_2_NC_TRACE_SILK  [SMT-JUMPER_2_NC_TRACE_SILK]  81.32,60 270 bottom
POE_LED2  JUMPER-SMT_2_NC_TRACE_SILK  [SMT-JUMPER_2_NC_TRACE_SILK]  119.82,60 270 bottom
POE_LED3  JUMPER-SMT_2_NC_TRACE_SILK  [SMT-JUMPER_2_NC_TRACE_SILK]  8.91,80.16 90 bottom
POE_LED4  JUMPER-SMT_2_NC_TRACE_SILK  [SMT-JUMPER_2_NC_TRACE_SILK]  47.42,80.16 90 bottom
POE_LED5  JUMPER-SMT_2_NC_TRACE_SILK  [SMT-JUMPER_2_NC_TRACE_SILK]  85.93,80.16 90 bottom
PWR_LED  JUMPER-SMT_2_NC_TRACE_SILK  [SMT-JUMPER_2_NC_TRACE_SILK]  37.81,7 0 bottom
PWR_LED1  JUMPER-SMT_2_NC_TRACE_SILK  [SMT-JUMPER_2_NC_TRACE_SILK]  76.32,7 0 bottom
PWR_LED2  JUMPER-SMT_2_NC_TRACE_SILK  [SMT-JUMPER_2_NC_TRACE_SILK]  114.82,7 0 bottom
PWR_LED3  JUMPER-SMT_2_NC_TRACE_SILK  [SMT-JUMPER_2_NC_TRACE_SILK]  13.91,133.16 180 bottom
PWR_LED4  JUMPER-SMT_2_NC_TRACE_SILK  [SMT-JUMPER_2_NC_TRACE_SILK]  52.42,133.16 180 bottom
PWR_LED5  JUMPER-SMT_2_NC_TRACE_SILK  [SMT-JUMPER_2_NC_TRACE_SILK]  90.93,133.16 180 bottom
Q1  220mA/50V/3.5Ω  [SOT23-3]  14.81,6 90 top
Q2  20V/4.2A/52mΩ/1.4W  [SOT23-3]  49.32,6 90 top
Q3  220mA/50V/3.5Ω  [SOT23-3]  53.32,6 90 top
Q4  20V/4.2A/52mΩ/1.4W  [SOT23-3]  87.82,6 90 top
Q5  20V/4.2A/52mΩ/1.4W  [SOT23-3]  10.81,6 90 top
Q6  220mA/50V/3.5Ω  [SOT23-3]  91.82,6 90 top
Q7  20V/4.2A/52mΩ/1.4W  [SOT23-3]  40.91,134.16 270 top
Q8  220mA/50V/3.5Ω  [SOT23-3]  36.91,134.16 270 top
Q9  20V/4.2A/52mΩ/1.4W  [SOT23-3]  79.42,134.16 270 top
Q10  220mA/50V/3.5Ω  [SOT23-3]  75.42,134.16 270 top
Q11  20V/4.2A/52mΩ/1.4W  [SOT23-3]  117.93,134.16 270 top
Q12  220mA/50V/3.5Ω  [SOT23-3]  113.93,134.16 270 top
R1  1M  [0603]  36.71,26 180 top
R2  49.9 1/2W  [1206]  23.81,15 0 top
R3  1k  [0603]  40.81,61 270 top
R4  10k  [0603]  18.81,7 90 top
R5  1k  [0603]  42.81,61 270 top
R6  10k  [0603]  14.81,9 0 top
R7  10k  [0603]  10.81,9 0 top
R8  12.4k  [0603]  35.81,39 270 top
R9  10k  [0603]  39.81,39 90 top
R10  10k  [0603]  41.81,39 90 top
R11  1k  [0603]  42.81,56 90 top
R12  10k  [0603]  43.81,39 90 top
R13  49.9  [0603]  22.81,46 90 top
R14  33  [0603]  38.81,46 90 top
R15  33  [0603]  40.81,46 90 top
R16  33  [0603]  16.81,46 90 top
R17  33  [0603]  18.81,46 90 top
R18  49.9  [0603]  26.81,46 270 top
R19  49.9  [0603]  36.81,46 270 top
R20  49.9  [0603]  34.81,46 270 top
R21  10  [0603]  32.81,46 270 top
R22  10k  [0603]  27.81,11 0 top
R23  10k  [0603]  20.81,7 90 top
R24  10k  [0603]  42.81,24 180 top
R25  1k  [0603]  37.81,8 0 top
R26  1k  [0603]  81.32,56 90 top
R27  10k  [0603]  53.32,9 0 top
R28  10k  [0603]  49.32,9 0 top
R29  1M  [0603]  75.22,26 180 top
R30  10k  [0603]  31.81,26 0 top
R31  1k  [0603]  79.32,61 270 top
R32  1k  [0603]  81.32,61 270 top
R33  12.4k  [0603]  74.32,39 270 top
R34  10k  [0603]  78.32,39 90 top
R35  10k  [0603]  80.32,39 90 top
R36  10k  [0603]  82.32,39 90 top
R37  49.9  [0603]  61.32,46 90 top
R38  33  [0603]  77.32,46 90 top
R39  33  [0603]  79.32,46 90 top
R40  33  [0603]  55.32,46 90 top
R41  33  [0603]  57.32,46 90 top
R42  49.9  [0603]  65.32,46 270 top
R43  49.9  [0603]  75.32,46 270 top
R44  49.9  [0603]  73.32,46 270 top
R45  10  [0603]  71.32,46 270 top
R46  10k  [0603]  66.32,11 0 top
R47  49.9 1/2W  [1206]  62.32,15 0 top
R48  10k  [0603]  57.32,7 90 top
R49  10k  [0603]  59.32,7 90 top
R50  10k  [0603]  81.32,24 180 top
R51  10k  [0603]  70.32,26 0 top
R52  1k  [0603]  76.32,8 0 top
R53  1k  [0603]  119.82,56 90 top
R54  10k  [0603]  91.82,9 0 top
R55  10k  [0603]  87.82,9 0 top
R56  1M  [0603]  113.72,26 180 top
R57  1k  [0603]  117.82,61 270 top
R58  1k  [0603]  119.82,61 270 top
R59  12.4k  [0603]  112.82,39 270 top
R60  10k  [0603]  116.82,39 90 top
R61  10k  [0603]  118.82,39 90 top
R62  10k  [0603]  120.82,39 90 top
R63  49.9  [0603]  99.82,46 90 top
R64  33  [0603]  115.82,46 90 top
R65  33  [0603]  117.82,46 90 top
R66  33  [0603]  93.82,46 90 top
R67  33  [0603]  95.82,46 90 top
R68  49.9  [0603]  103.82,46 270 top
R69  49.9  [0603]  113.82,46 270 top
R70  49.9  [0603]  111.82,46 270 top
R71  10  [0603]  109.82,46 270 top
R72  10k  [0603]  104.82,11 0 top
R73  49.9 1/2W  [1206]  100.82,15 0 top
R74  10k  [0603]  95.82,7 90 top
R75  10k  [0603]  97.82,7 90 top
R76  10k  [0603]  119.82,24 180 top
R77  10k  [0603]  108.82,26 0 top
R78  1k  [0603]  114.82,8 0 top
R79  1k  [0603]  8.91,84.16 270 top
R80  10k  [0603]  36.91,131.16 180 top
R81  10k  [0603]  40.91,131.16 180 top
R82  1M  [0603]  15.01,114.16 0 top
R83  1k  [0603]  10.91,79.16 90 top
R84  1k  [0603]  8.91,79.16 90 top
R85  12.4k  [0603]  15.91,101.16 90 top
R86  10k  [0603]  11.91,101.16 270 top
R87  10k  [0603]  9.91,101.16 270 top
R88  10k  [0603]  7.91,101.16 270 top
R89  49.9  [0603]  28.91,94.16 270 top
R90  33  [0603]  12.91,94.16 270 top
R91  33  [0603]  10.91,94.16 270 top
R92  33  [0603]  34.91,94.16 270 top
R93  33  [0603]  32.91,94.16 270 top
R94  49.9  [0603]  24.91,94.16 90 top
R95  49.9  [0603]  14.91,94.16 90 top
R96  49.9  [0603]  16.91,94.16 90 top
R97  10  [0603]  18.91,94.16 90 top
R98  10k  [0603]  23.91,129.16 180 top
R99  49.9 1/2W  [1206]  27.91,125.16 180 top
R100  10k  [0603]  32.91,133.16 270 top
R101  10k  [0603]  30.91,133.16 270 top
R102  10k  [0603]  8.91,116.16 0 top
R103  10k  [0603]  19.91,114.16 180 top
R104  1k  [0603]  13.91,132.16 180 top
R105  1k  [0603]  47.42,84.16 270 top
R106  10k  [0603]  75.42,131.16 180 top
R107  10k  [0603]  79.42,131.16 180 top
R108  1M  [0603]  53.52,114.16 0 top
R109  1k  [0603]  49.42,79.16 90 top
R110  1k  [0603]  47.42,79.16 90 top
R111  12.4k  [0603]  54.42,101.16 90 top
R112  10k  [0603]  50.42,101.16 270 top
R113  10k  [0603]  48.42,101.16 270 top
R114  10k  [0603]  46.42,101.16 270 top
R115  49.9  [0603]  67.42,94.16 270 top
R116  33  [0603]  51.42,94.16 270 top
R117  33  [0603]  49.42,94.16 270 top
R118  33  [0603]  73.42,94.16 270 top
R119  33  [0603]  71.42,94.16 270 top
R120  49.9  [0603]  63.42,94.16 90 top
R121  49.9  [0603]  53.42,94.16 90 top
R122  49.9  [0603]  55.42,94.16 90 top
R123  10  [0603]  57.42,94.16 90 top
R124  10k  [0603]  62.42,129.16 180 top
R125  49.9 1/2W  [1206]  66.42,125.16 180 top
R126  10k  [0603]  71.42,133.16 270 top
R127  10k  [0603]  69.42,133.16 270 top
R128  10k  [0603]  47.42,116.16 0 top
R129  10k  [0603]  58.42,114.16 180 top
R130  1k  [0603]  52.42,132.16 180 top
R131  1k  [0603]  85.93,84.16 270 top
R132  10k  [0603]  113.93,131.16 180 top
R133  10k  [0603]  117.93,131.16 180 top
R134  1M  [0603]  92.03,114.16 0 top
R135  1k  [0603]  87.93,79.16 90 top
R136  1k  [0603]  85.93,79.16 90 top
R137  12.4k  [0603]  92.93,101.16 90 top
R138  10k  [0603]  88.93,101.16 270 top
R139  10k  [0603]  86.93,101.16 270 top
R140  10k  [0603]  84.93,101.16 270 top
R141  49.9  [0603]  105.93,94.16 270 top
R142  33  [0603]  89.93,94.16 270 top
R143  33  [0603]  87.93,94.16 270 top
R144  33  [0603]  111.93,94.16 270 top
R145  33  [0603]  109.93,94.16 270 top
R146  49.9  [0603]  101.93,94.16 90 top
R147  49.9  [0603]  91.93,94.16 90 top
R148  49.9  [0603]  93.93,94.16 90 top
R149  10  [0603]  95.93,94.16 90 top
R150  10k  [0603]  100.93,129.16 180 top
R151  49.9 1/2W  [1206]  104.93,125.16 180 top
R152  10k  [0603]  109.93,133.16 270 top
R153  10k  [0603]  107.93,133.16 270 top
R154  10k  [0603]  85.93,116.16 0 top
R155  10k  [0603]  96.93,114.16 180 top
R156  1k  [0603]  90.93,132.16 180 top
TP1  TEST-POINT3X4  [PAD.03X.04]  39.81,15 0 bottom
TP2  TEST-POINT3X4  [PAD.03X.04]  78.32,15 0 bottom
TP3  TEST-POINT3X4  [PAD.03X.04]  116.82,15 0 bottom
TP4  TEST-POINT3X4  [PAD.03X.04]  11.91,125.16 180 bottom
TP5  TEST-POINT3X4  [PAD.03X.04]  50.42,125.16 180 bottom
TP6  TEST-POINT3X4  [PAD.03X.04]  88.93,125.16 180 bottom
U1  EEPROM  [SO08]  25.81,7 270 top
U2  EEPROM  [SO08]  64.32,7 270 top
U3  W5500  [LQFP-48]  38.81,32 180 top
U4  3.3V  [SOT23-5]  42.81,15 0 top
U5  POE_PSU-DP990X  [DP990X]  16.81,28 90 top
U6  W5500  [LQFP-48]  77.32,32 180 top
U7  3.3V  [SOT23-5]  81.32,15 0 top
U8  POE_PSU-DP990X  [DP990X]  55.32,28 90 top
U9  EEPROM  [SO08]  102.82,7 270 top
U10  W5500  [LQFP-48]  115.82,32 180 top
U11  3.3V  [SOT23-5]  119.82,15 0 top
U12  POE_PSU-DP990X  [DP990X]  93.82,28 90 top
U13  EEPROM  [SO08]  25.91,133.16 90 top
U14  W5500  [LQFP-48]  12.91,108.16 0 top
U15  3.3V  [SOT23-5]  8.91,125.16 180 top
U16  POE_PSU-DP990X  [DP990X]  34.91,112.16 270 top
U17  EEPROM  [SO08]  64.42,133.16 90 top
U18  W5500  [LQFP-48]  51.42,108.16 0 top
U19  3.3V  [SOT23-5]  47.42,125.16 180 top
U20  POE_PSU-DP990X  [DP990X]  73.42,112.16 270 top
U21  EEPROM  [SO08]  102.93,133.16 90 top
U22  W5500  [LQFP-48]  89.93,108.16 0 top
U23  3.3V  [SOT23-5]  85.93,125.16 180 top
U24  POE_PSU-DP990X  [DP990X]  111.93,112.16 270 top
U$1  [ETHERNET0]  24.81,37 0 bottom
U$2  [#POE#0]  24.81,35 0 bottom
U$3  [#POWER_CARRIER#0]  24.81,20 0 bottom
U$4  [MICROMOD_LOGO_.35]  51.37,60 90 top
U$5  [#DUMMY_LOAD#0]  22.71,16 0 bottom
U$6  [#WP#0]  26.21,13 0 bottom
U$7  [PWR0]  41.81,6 0 top
U$8  [#ACT#0]  39.81,56.8 270 bottom
U$9  [POE0]  13.81,56.3 0 bottom
U$10  [MICROMOD_LOGO_.35]  63.32,41 0 bottom
U$11  [#MEAS#3]  75.52,11 0 bottom
U$12  [#LNK#1]  36.81,57 270 bottom
U$13  [#PMODE#0]  38.81,36 0 bottom
U$14  [01]  38.71,34 0 bottom
U$15  [12]  38.71,32 0 bottom
U$16  [23]  38.71,30 0 bottom
U$17  [ETHERNET0]  38.81,56 90 top
U$18  [#POE#0]  40.81,52.1 90 top
U$19  [#0]  16.81,50 0 bottom
U$20  [CAUTION#0]  22.41,13 0 top
U$21  [HOT#1]  27.31,13.1 0 top
U$22  [#PWR#0]  34.61,7 0 bottom
U$23  [#_POE#0]  42.81,56.8 270 bottom
U$24  [PWR1]  13.81,55 0 bottom
U$25  [#1]  16.81,53 0 bottom
U$26  [FUNCTION0]  14.81,60 90 top
U$27  [FUNCTION0]  24.81,39 0 bottom
U$28  [#MEAS#3]  37.01,11 0 bottom
U$29  [PWR0]  80.32,6 0 top
U$30  [#PMODE#0]  77.32,36 0 bottom
U$31  [01]  77.22,34 0 bottom
U$32  [12]  77.22,32 0 bottom
U$33  [23]  77.22,30 0 bottom
U$34  [ETHERNET0]  77.32,56 90 top
U$35  [#POE#0]  79.32,52.1 90 top
U$36  [ETHERNET0]  63.32,37 0 bottom
U$37  [MICROMOD_LOGO_.35]  24.81,41 0 bottom
U$38  [#POE#0]  63.32,35 0 bottom
U$39  [#POWER_CARRIER#0]  63.32,20 0 bottom
U$40  [#DUMMY_LOAD#0]  61.22,16 0 bottom
U$41  [#WP#0]  64.72,13 0 bottom
U$42  [#ACT#0]  78.32,56.8 270 bottom
U$43  [#LNK#1]  75.32,57 270 bottom
U$44  [CAUTION#0]  60.92,13 0 top
U$45  [HOT#1]  65.82,13.1 0 top
U$46  [#PWR#0]  73.12,7 0 bottom
U$47  [#_POE#0]  81.32,56.8 270 bottom
U$48  [POE0]  52.32,56.3 0 bottom
U$49  [PWR1]  52.32,55 0 bottom
U$50  [#0]  55.32,50 0 bottom
U$51  [#1]  55.32,53 0 bottom
U$52  [FUNCTION0]  53.32,60 90 top
U$53  [FUNCTION0]  63.32,39 0 bottom
U$54  [MICROMOD_LOGO_.35]  89.87,60 90 top
U$55  [MICROMOD_LOGO_.35]  101.82,41 0 bottom
U$56  [#MEAS#3]  114.02,11 0 bottom
U$57  [PWR0]  118.82,6 0 top
U$58  [#PMODE#0]  115.82,36 0 bottom
U$59  [01]  115.72,34 0 bottom
U$60  [12]  115.72,32 0 bottom
U$61  [23]  115.72,30 0 bottom
U$62  [ETHERNET0]  115.82,56 90 top
U$63  [MICROMOD_LOGO_.35]  12.86,60 90 top
U$64  [#POE#0]  117.82,52.1 90 top
U$65  [ETHERNET0]  101.82,37 0 bottom
U$66  [#POE#0]  101.82,35 0 bottom
U$67  [#POWER_CARRIER#0]  101.82,20 0 bottom
U$68  [#DUMMY_LOAD#0]  99.72,16 0 bottom
U$69  [#WP#0]  103.22,13 0 bottom
U$70  [#ACT#0]  116.82,56.8 270 bottom
U$71  [#LNK#1]  113.82,57 270 bottom
U$72  [CAUTION#0]  99.42,13 0 top
U$73  [HOT#1]  104.32,13.1 0 top
U$74  [#PWR#0]  111.62,7 0 bottom
U$75  [#_POE#0]  119.82,56.8 270 bottom
U$76  [POE0]  90.82,56.3 0 bottom
U$77  [PWR1]  90.82,55 0 bottom
U$78  [#0]  93.82,50 0 bottom
U$79  [#1]  93.82,53 0 bottom
U$80  [FUNCTION0]  91.82,60 90 top
U$81  [FUNCTION0]  101.82,39 0 bottom
U$82  [MICROMOD_LOGO_.35]  38.86,80.16 270 top
U$83  [MICROMOD_LOGO_.35]  26.91,99.16 180 bottom
U$84  [#MEAS#3]  14.71,129.16 180 bottom
U$85  [PWR0]  9.91,134.16 180 top
U$86  [#PMODE#0]  12.91,104.16 180 bottom
U$87  [01]  13.01,106.16 180 bottom
U$88  [12]  13.01,108.16 180 bottom
U$89  [23]  13.01,110.16 180 bottom
U$90  [ETHERNET0]  12.91,84.16 270 top
U$91  [#POE#0]  10.91,88.06 270 top
U$92  [ETHERNET0]  26.91,103.16 180 bottom
U$93  [#POE#0]  26.91,105.16 180 bottom
U$94  [#POWER_CARRIER#0]  26.91,120.16 180 bottom
U$95  [#DUMMY_LOAD#0]  29.01,124.16 180 bottom
U$96  [#WP#0]  25.51,127.16 180 bottom
U$97  [#ACT#0]  11.91,83.36 90 bottom
U$98  [#LNK#1]  14.91,83.16 90 bottom
U$99  [CAUTION#0]  29.31,127.16 180 top
U$100  [HOT#1]  24.41,127.06 180 top
U$101  [#PWR#0]  17.11,133.16 180 bottom
U$102  [#_POE#0]  8.91,83.36 90 bottom
U$103  [POE0]  37.91,83.86 180 bottom
U$104  [PWR1]  37.91,85.16 180 bottom
U$105  [#0]  34.91,90.16 180 bottom
U$106  [#1]  34.91,87.16 180 bottom
U$107  [FUNCTION0]  36.91,80.16 270 top
U$108  [FUNCTION0]  26.91,101.16 180 bottom
U$109  [MICROMOD_LOGO_.35]  77.37,80.16 270 top
U$110  [MICROMOD_LOGO_.35]  65.42,99.16 180 bottom
U$111  [#MEAS#3]  53.22,129.16 180 bottom
U$112  [PWR0]  48.42,134.16 180 top
U$113  [#PMODE#0]  51.42,104.16 180 bottom
U$114  [01]  51.52,106.16 180 bottom
U$115  [12]  51.52,108.16 180 bottom
U$116  [23]  51.52,110.16 180 bottom
U$117  [ETHERNET0]  51.42,84.16 270 top
U$118  [#POE#0]  49.42,88.06 270 top
U$119  [ETHERNET0]  65.42,103.16 180 bottom
U$120  [#POE#0]  65.42,105.16 180 bottom
U$121  [#POWER_CARRIER#0]  65.42,120.16 180 bottom
U$122  [#DUMMY_LOAD#0]  67.52,124.16 180 bottom
U$123  [#WP#0]  64.02,127.16 180 bottom
U$124  [#ACT#0]  50.42,83.36 90 bottom
U$125  [#LNK#1]  53.42,83.16 90 bottom
U$126  [CAUTION#0]  67.82,127.16 180 top
U$127  [HOT#1]  62.92,127.06 180 top
U$128  [#PWR#0]  55.62,133.16 180 bottom
U$129  [#_POE#0]  47.42,83.36 90 bottom
U$130  [POE0]  76.42,83.86 180 bottom
U$131  [PWR1]  76.42,85.16 180 bottom
U$132  [#0]  73.42,90.16 180 bottom
U$133  [#1]  73.42,87.16 180 bottom
U$134  [FUNCTION0]  75.42,80.16 270 top
U$135  [FUNCTION0]  65.42,101.16 180 bottom
U$136  [MICROMOD_LOGO_.35]  115.88,80.16 270 top
U$137  [MICROMOD_LOGO_.35]  103.93,99.16 180 bottom
U$138  [#MEAS#3]  91.73,129.16 180 bottom
U$139  [PWR0]  86.93,134.16 180 top
U$140  [#PMODE#0]  89.93,104.16 180 bottom
U$141  [01]  90.03,106.16 180 bottom
U$142  [12]  90.03,108.16 180 bottom
U$143  [23]  90.03,110.16 180 bottom
U$144  [ETHERNET0]  89.93,84.16 270 top
U$145  [#POE#0]  87.93,88.06 270 top
U$146  [ETHERNET0]  103.93,103.16 180 bottom
U$147  [#POE#0]  103.93,105.16 180 bottom
U$148  [#POWER_CARRIER#0]  103.93,120.16 180 bottom
U$149  [#DUMMY_LOAD#0]  106.03,124.16 180 bottom
U$150  [#WP#0]  102.53,127.16 180 bottom
U$151  [#ACT#0]  88.93,83.36 90 bottom
U$152  [#LNK#1]  91.93,83.16 90 bottom
U$153  [CAUTION#0]  106.33,127.16 180 top
U$154  [HOT#1]  101.43,127.06 180 top
U$155  [#PWR#0]  94.13,133.16 180 bottom
U$156  [#_POE#0]  85.93,83.36 90 bottom
U$157  [POE0]  114.93,83.86 180 bottom
U$158  [PWR1]  114.93,85.16 180 bottom
U$159  [#0]  111.93,90.16 180 bottom
U$160  [#1]  111.93,87.16 180 bottom
U$161  [FUNCTION0]  113.93,80.16 270 top
U$162  [FUNCTION0]  103.93,101.16 180 bottom
Y1  25MHz  [CRYSTAL-SMD-2.0X1.6MM]  36.71,24 180 top
Y2  25MHz  [CRYSTAL-SMD-2.0X1.6MM]  75.22,24 180 top
Y3  25MHz  [CRYSTAL-SMD-2.0X1.6MM]  113.72,24 180 top
Y4  25MHz  [CRYSTAL-SMD-2.0X1.6MM]  15.01,116.16 0 top
Y5  25MHz  [CRYSTAL-SMD-2.0X1.6MM]  53.52,116.16 0 top
Y6  25MHz  [CRYSTAL-SMD-2.0X1.6MM]  92.03,116.16 0 top

## Library data of the parts
C1 C3 C4 C28-C30 C54-C56 C80-C82 C106-C108 C132-C134 = SparkFun-Capacitors; PROD_ID: CAP-00810
C2 C10-C12 C14 C15 C34-C39 C60-C65 C86-C91 C112-C117 C138-C143 = SparkFun-Capacitors; PROD_ID: CAP-08604
C5 C6 C31 C32 C57 C58 C83 C84 C109 C110 C135 C136 = SparkFun-Capacitors; PROD_ID: CAP-11812
C7 C25 C26 C50-C52 C76-C78 C102-C104 C128-C130 C154-C156 = SparkFun-Capacitors; PROD_ID: CAP-14259
C8 C49 C75 C101 C127 C153 = SparkFun-Capacitors; PROD_ID: CAP-12547
C9 C16 C33 C40 C59 C66 C85 C92 C111 C118 C137 C144 = SparkFun-Capacitors; PROD_ID: CAP-11015
C13 C27 C53 C79 C105 C131 = SparkFun-Capacitors; PROD_ID: CAP-00868
C17 C20 C41 C44 C67 C70 C93 C96 C119 C122 C145 C148 = SparkFun-Capacitors; PROD_ID: CAP-00867
C18 C42 C68 C94 C120 C146 = SparkFun-Capacitors; PROD_ID: CAP-08280
C19 C43 C69 C95 C121 C147 = SparkFun-Capacitors; PROD_ID: CAP-16238
C21 C22 C45 C46 C71 C72 C97 C98 C123 C124 C149 C150 = SparkFun-Capacitors; PROD_ID: CAP-16239
C23 C47 C73 C99 C125 C151 = SparkFun-Capacitors; PROD_ID: CAP-07885
C24 C48 C74 C100 C126 C152 = SparkFun-Capacitors; PROD_ID: CAP-13930
D1 D4 D10 D14 D18 D22 = SparkFun-DiscreteSemi; PROD_ID: DIO-14072
D2 D6 D11 D15 D19 D23 = SparkFun-LED; PROD_ID: DIO-00819
D3 D5 D9 D13 D17 D21 = SparkFun-LED; PROD_ID: DIO-09003
D7 D8 D12 D16 D20 D24 = SparkFun-DiscreteSemi; PROD_ID: IC-13538
E$1-E$4 FD1-FD24 LOGO1-LOGO18 = SparkFun-Aesthetics
E$5 E$6 = SparkFun-Retired
FB1-FB6 = SparkFun-Coils; PROD_ID: NDUC-12579
ISO1-ISO12 JP1-JP24 LED1-LED12 LOAD LOAD1-LOAD5 MEAS MEAS1-MEAS5 POE POE1-POE5 POE_LED POE_LED1-POE_LED5 PWR_LED PWR_LED1-PWR_LED5 = SparkFun-Jumpers
J1 J3 J5 J7 J9 J12 = SparkFun-Connectors; PROD_ID: CONN-16253
J2 J4 J6 J8 J10 J11 = SparkFun-MicroMod-Function
L1-L6 = SparkFun-Coils; PROD_ID: NDUC-14234
Q1 Q3 Q6 Q8 Q10 Q12 = SparkFun-DiscreteSemi; PROD_ID: TRANS-00830
Q2 Q4 Q5 Q7 Q9 Q11 = SparkFun-DiscreteSemi; PROD_ID: TRANS-14388
R1 R29 R56 R82 R108 R134 = SparkFun-Resistors; PROD_ID: RES-07868
R2 R47 R73 R99 R125 R151 = SparkFun-Resistors; PROD_ID: RES-16252
R3 R5 R11 R25 R26 R31 R32 R52 R53 R57 R58 R78 R79 R83 R84 R104 R105 R109 R110 R130 R131 R135 R136 R156 = SparkFun-Resistors; PROD_ID: RES-07856
R4 R6 R7 R9 R10 R12 R22-R24 R27 R28 R30 R34-R36 R46 R48-R51 R54 R55 R60-R62 R72 R74-R77 R80 R81 R86-R88 R98 R100-R103 R106 R107 R112-R114 R124 R126-R129 R132 R133 R138-R140 R150 R152-R155 = SparkFun-Resistors; PROD_ID: RES-00824
R8 R33 R59 R85 R111 R137 = SparkFun-Resistors; PROD_ID: RES-16236
R13 R18-R20 R37 R42-R44 R63 R68-R70 R89 R94-R96 R115 R120-R122 R141 R146-R148 = SparkFun-Resistors; PROD_ID: RES-16237
R14-R17 R38-R41 R64-R67 R90-R93 R116-R119 R142-R145 = SparkFun-Resistors; PROD_ID: RES-08270
R21 R45 R71 R97 R123 R149 = SparkFun-Resistors; PROD_ID: RES-12581
TP1-TP6 = SparkFun-Connectors
U1 U2 U9 U13 U17 U21 = SparkFun-IC-Memory; PROD_ID: IC-14645
U3 U6 U10 U14 U18 U22 = SparkFun-IC-Comms; PROD_ID: IC-16240
U4 U7 U11 U15 U19 U23 = SparkFun-IC-Power; PROD_ID: VREG-12457
U5 U8 U12 U16 U20 U24 = SparkFun-IC-Power; PROD_ID: IC-16251
U$1-U$3 U$5-U$9 U$11-U$36 U$38-U$53 U$56-U$62 U$64-U$81 U$84-U$108 U$111-U$135 U$138-U$162 = output
U$4 U$10 U$37 U$54 U$55 U$63 U$82 U$83 U$109 U$110 U$136 U$137 = SparkFun-MicroMod
Y1-Y6 = SparkFun-Clocks; PROD_ID: XTAL-16235